# EAGLE board ArduinoPCB (EAGLE 9.5.0)
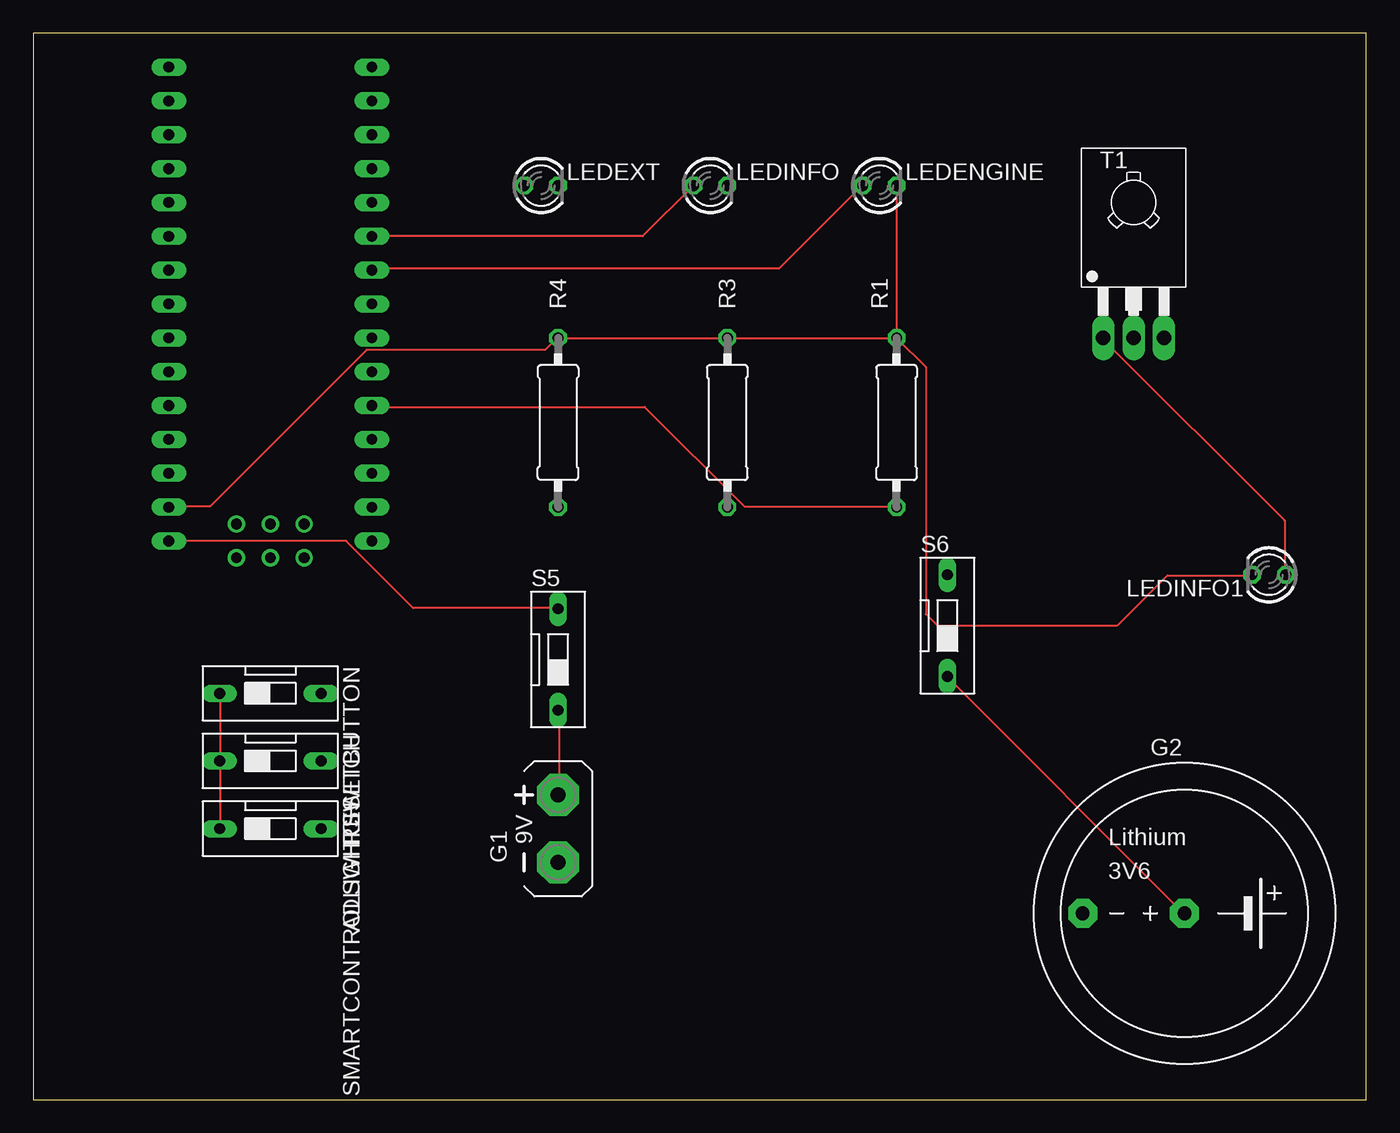
[diagram p0: board, top side]
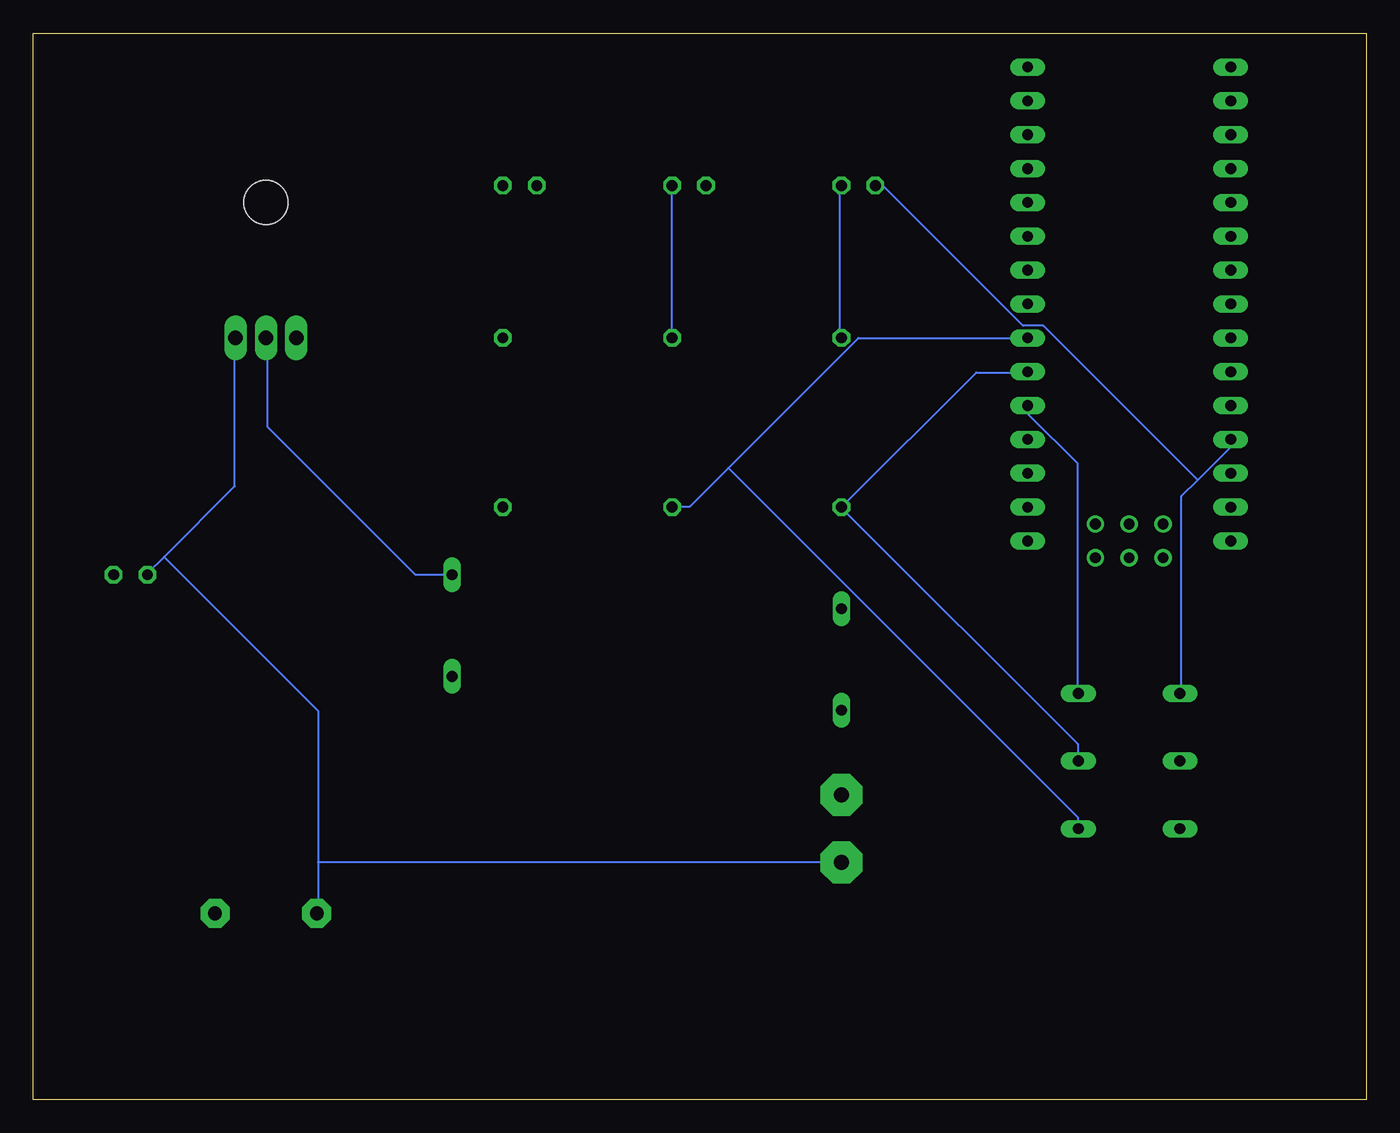
[diagram p1: board, bottom side, seen from below]

Size 100 x 80 mm. Coordinates in mm from the lower left corner, seen from the top.
Outline: 0,0 100,0 100,80 0,80 0,0
Copper layers (1*16): Top 0.035mm / dielectric 1.5mm / Bottom 0.035mm
Design rules "default": minimum track width 6mil, minimum drill 0.35mm, track to track 6mil, track to pad 6mil, pad to pad 6mil, via to via 6mil, smd to smd 6mil, copper to edge 40mil, drill to drill 6mil, minimum pad ring 10mil, minimum via ring 8mil, stop-mask expansion 4mil, vias tented up to drill 0mil, thermal gap 10mil

## Footprints (pad centres in the part's own frame; a part is rotated, then mirrored left to right if it is on the bottom)
DS-01 = drill 0.813 long: 1 0,-3.81; 2 0,3.81
AB9V = drill 1.118 pad 3.15 octagon: + 0,2.54; - 0,-2.54
SL-340/P3.6V = drill 1.016 pad 2.159 octagon: + 0,0; - -7.62,0
LED3MM = drill 0.813 octagon: A -1.27,0; K 1.27,0
0309/12 = drill 0.813 octagon: 1 -6.35,0; 2 6.35,0
TO126 = drill 1.118 long: 1 -2.286,-5.08; 2 0,-5.08; 3 2.286,-5.08 | hole 3.302: 0,5.08
NANO = drill 0.8 long: 3.3V -10.16,24.13; 5V -10.16,-1.27; A0 -10.16,19.05; A1 -10.16,16.51; A2 -10.16,13.97; A3 -10.16,11.43; A4 -10.16,8.89; A5 -10.16,6.35; A6 -10.16,3.81; A7 -10.16,1.27; AREF -10.16,21.59; D2 5.08,1.27; D3 5.08,3.81; D4 5.08,6.35; D5 5.08,8.89; D6 5.08,11.43; D7 5.08,13.97; D8 5.08,16.51; D9 5.08,19.05; D10 5.08,21.59; D11 5.08,24.13; D12 5.08,26.67; D13 -10.16,26.67; GND -10.16,-6.35; GND1 5.08,-1.27; RAW -10.16,-8.89; RST -10.16,-3.81; RST1 5.08,-3.81; RX1 5.08,-6.35; TX0 5.08,-8.89 | drill 0.8: ICSP1 -5.08,-10.16; ICSP2 -5.08,-7.62; ICSP3 -2.54,-10.16; ICSP4 -2.54,-7.62; ICSP5 0,-10.16; ICSP6 0,-7.62

## Placement (x,y rotation side)
ADLIGHTSWITCH  [DS-01]  17.78,25.4 270 top
FRAME1  FRAME-LETTER  [CREATIVE_COMMONS]  -80.01,66.04 0 top  (outside the outline)
G1  AB9V  [AB9V]  39.37,20.32 0 top
G2  SL-340/P3.6V  [SL-340/P3.6V]  86.36,13.97 0 top
LEDENGINE  [LED3MM]  63.5,68.58 0 top
LEDEXT  [LED3MM]  38.1,68.58 0 top
LEDINFO  [LED3MM]  50.8,68.58 0 top
LEDINFO1  [LED3MM]  92.71,39.37 180 top
R1  [0309/12]  64.77,50.8 90 top
R3  [0309/12]  52.07,50.8 90 top
R4  [0309/12]  39.37,50.8 90 top
RESETBUTTON  [DS-01]  17.78,30.48 270 top
S5  [DS-01]  39.37,33.02 0 top
S6  [DS-01]  68.58,35.56 0 top
SMARTCONTROLSWITCH  [DS-01]  17.78,20.32 270 top
T1  2N4923  [TO126]  82.55,62.23 0 top
U$1  NANO  [NANO]  20.32,50.8 0 top

## Library data of the parts
ADLIGHTSWITCH RESETBUTTON S5 S6 SMARTCONTROLSWITCH = switch-dil; OC_FARNELL: unknown; OC_NEWARK: unknown
FRAME1 = SparkFun-Aesthetics
G1 G2 = battery
LEDENGINE LEDEXT LEDINFO LEDINFO1 = led
R1 R3 R4 = rcl; SPICEPREFIX: R
T1 = transistor
U$1 = Arduino-clone

## Nets
N$1: ADLIGHTSWITCH.2 R4.1 U$1.D3
N$2: R3.1 SMARTCONTROLSWITCH.2 U$1.D4
N$3: G2.+ S6.1
N$4: G1.+ S5.1
N$5: LEDINFO1.A T1.1
N$8: G1.- G2.- LEDENGINE.K LEDEXT.K LEDINFO1.K LEDINFO.K R1.2 R3.2 R4.2 T1.3 U$1.GND
N$9: ADLIGHTSWITCH.1 LEDEXT.A RESETBUTTON.1 SMARTCONTROLSWITCH.1 U$1.5V
N$10: LEDENGINE.A U$1.D6
N$11: LEDINFO.A U$1.D7
N$12: S5.2 U$1.RAW
N$14: R1.1 RESETBUTTON.2 U$1.D2
N$16: S6.2 T1.2

## Tracks (layer width: path | path; a pad name or v marks a point on that pad's centre or on a via)
N$1
  Bottom 0.152: U$1.D3 25.45,54.56 29.26,54.56 R4.1 39.32,44.35 21.64,26.67 21.64,25.45 ADLIGHTSWITCH.2
N$2
  Bottom 0.152: U$1.D4 38.1,57.15 47.85,47.4 | 47.85,47.4 50.75,44.5 51.97,44.5 R3.1 | 47.85,47.4 21.64,21.18 21.64,20.42 SMARTCONTROLSWITCH.2
N$3
  Top 0.152: S6.1 68.58,31.7 86.26,14.02 G2.+
N$4
  Top 0.152: S5.1 39.47,29.11 39.47,22.86 G1.+
N$5
  Top 0.152: LEDINFO1.A 93.88,39.47 93.88,43.43 80.16,57.15 T1.1
N$8
  Top 0.152: LEDENGINE.K R1.2 | U$1.GND 10.21,44.5 13.26,44.5 24.99,56.24 38.41,56.24 39.32,57.15 R4.2 R3.2 R1.2 | R1.2 66.95,54.97 66.95,36.42 67.82,35.56 81.33,35.56 85.09,39.32 91.44,39.32 LEDINFO1.K
  Bottom 0.152: 78.64,17.83 78.64,29.16 90.19,40.72 | 78.64,17.83 78.64,14.02 G2.- | 78.64,17.83 39.47,17.83 G1.- | R3.2 52.12,57.15 52.12,68.58 LEDINFO.K | LEDEXT.K 39.47,68.58 39.47,57.15 R4.2 | 90.19,40.72 91.44,39.47 LEDINFO1.K | 90.19,40.72 84.89,46.02 84.89,57.15 T1.3
N$9
  Top 0.152: SMARTCONTROLSWITCH.1 14.02,20.42 14.02,25.3 ADLIGHTSWITCH.1 14.02,25.45 14.02,30.48 RESETBUTTON.1
  Bottom 0.152: 12.65,46.48 13.87,45.26 13.87,30.48 RESETBUTTON.1 | 12.65,46.48 10.21,48.92 10.21,49.53 U$1.5V | LEDEXT.A 36.27,68.58 25.76,58.06 24.23,58.06 12.65,46.48
N$10
  Top 0.152: U$1.D6 25.45,62.33 55.93,62.33 62.18,68.58 LEDENGINE.A
N$11
  Top 0.152: U$1.D7 45.72,64.77 LEDINFO.A
N$12
  Top 0.152: U$1.RAW 23.47,41.91 28.5,36.88 39.32,36.88 S5.2
N$14
  Top 0.152: R1.1 64.77,44.5 53.34,44.5 45.87,51.97 25.45,51.97 U$1.D2
  Bottom 0.152: U$1.D2 25.3,51.97 25.3,51.36 21.64,47.7 21.64,30.48 RESETBUTTON.2
N$16
  Bottom 0.152: S6.2 71.32,39.37 82.45,50.49 82.45,57.15 T1.2